# Altium PCB PCB1.PcbDoc
Units mm, origin at the board's own origin, x right, y up, seen from the top; angles counter-clockwise.
Board outline 38.5 x 20.5 mm, 2 copper layers (Top Layer, Bottom Layer); 4 components, 6 nets, 14 pads, 2 vias.
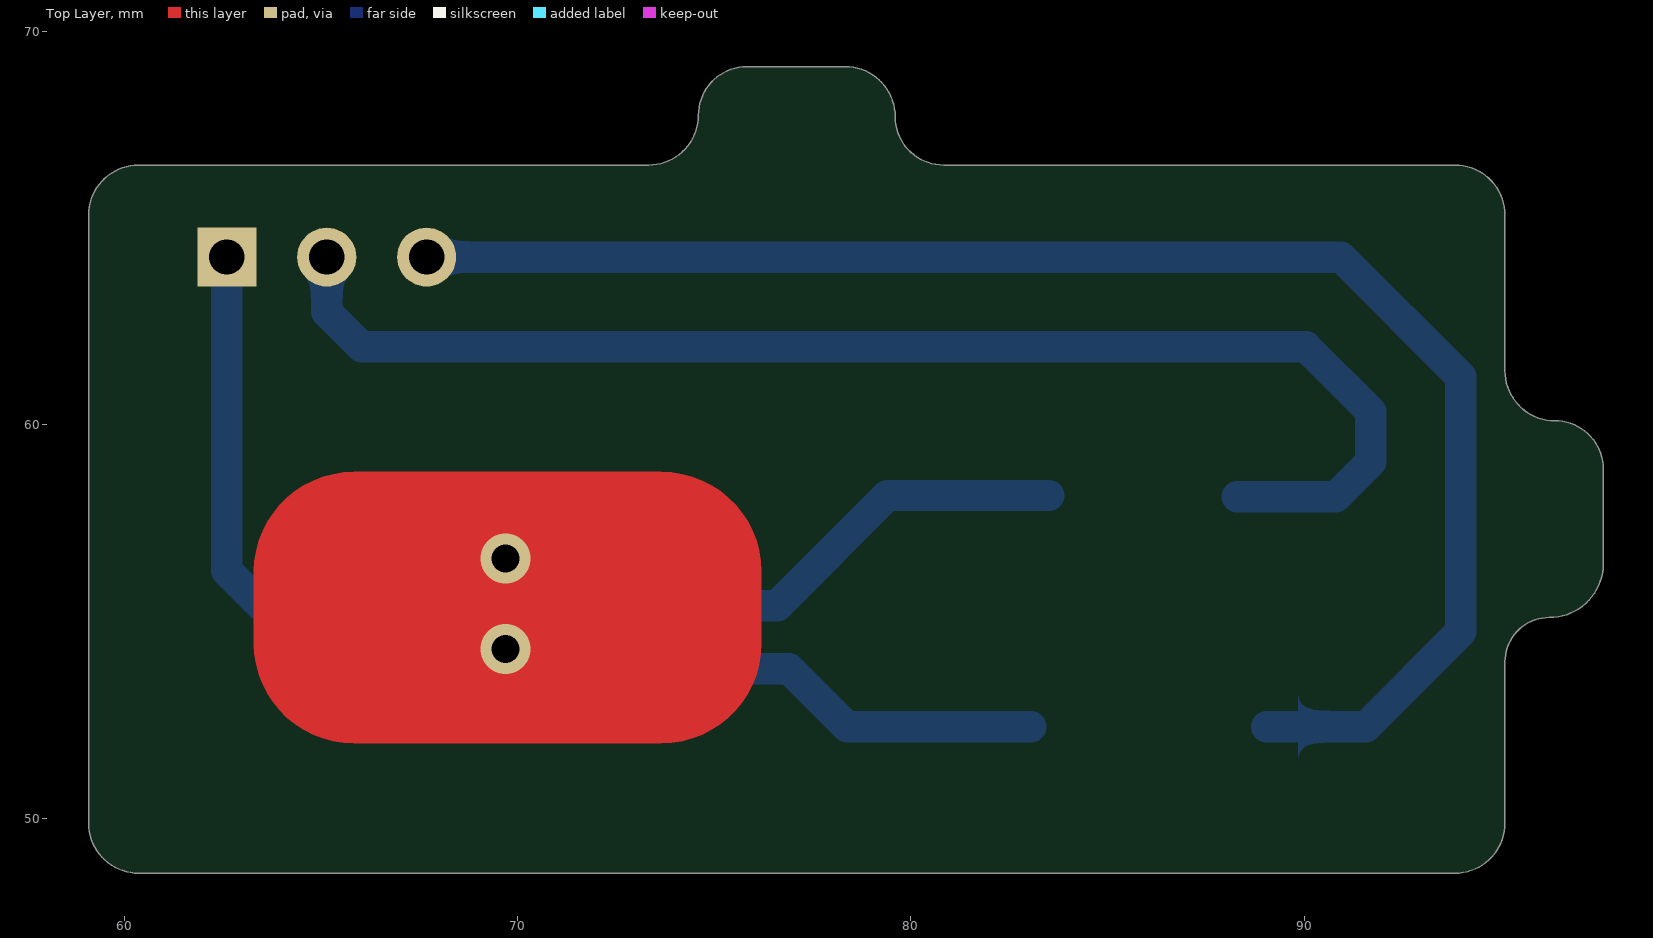
[diagram p0: Top Layer view]
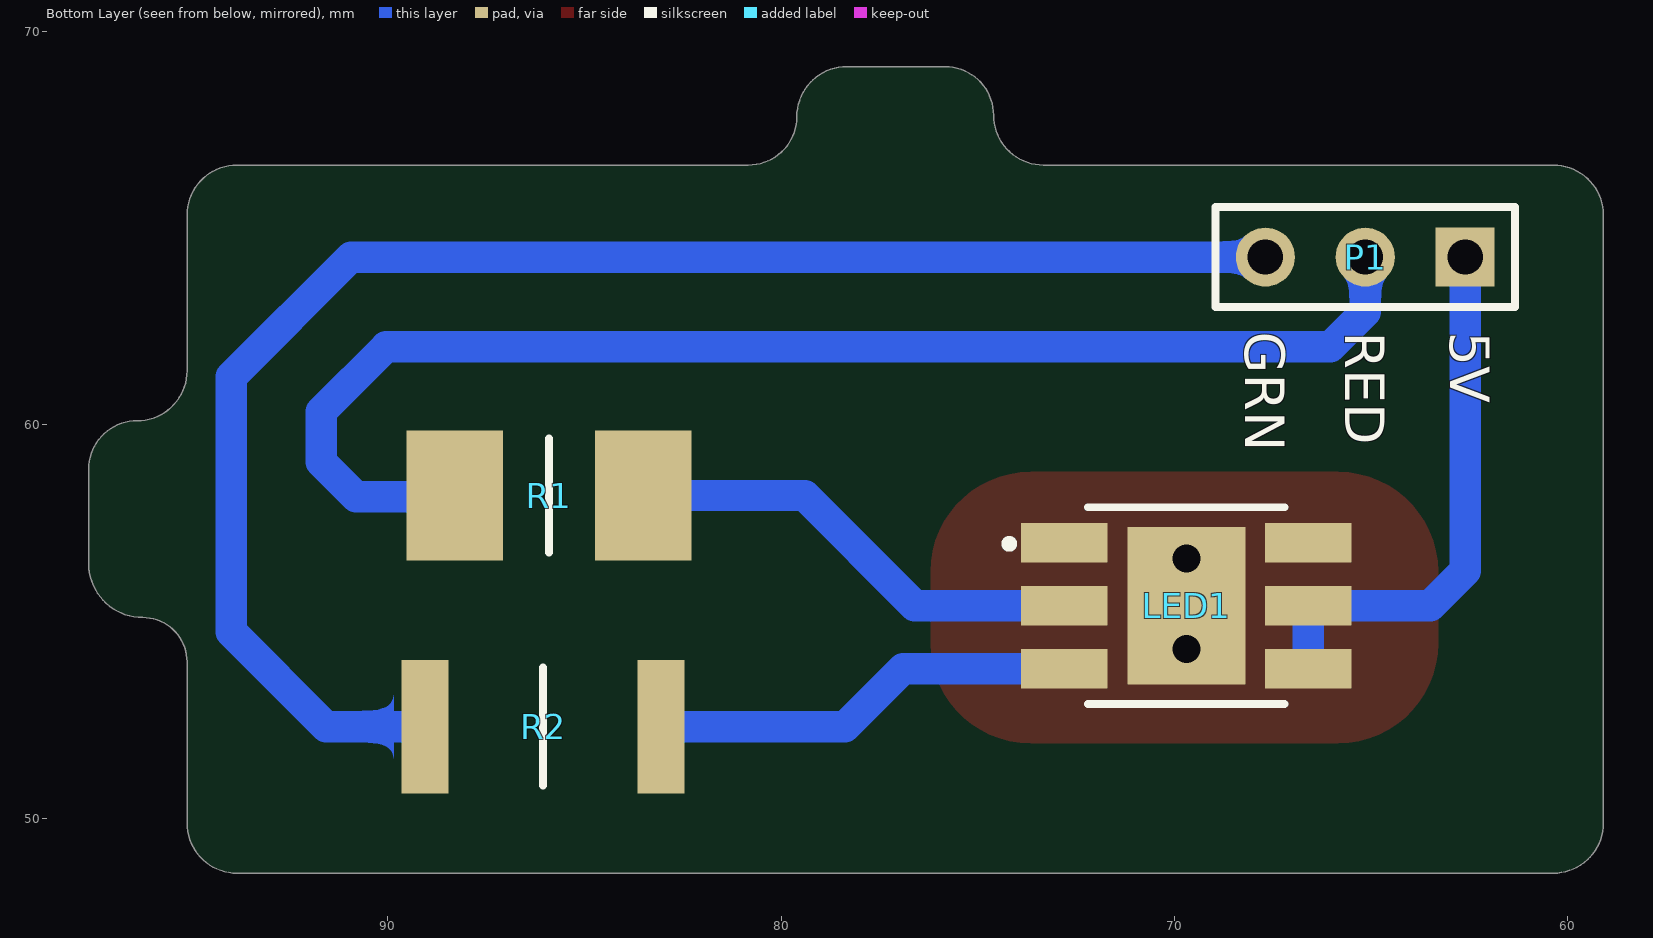
[diagram p1: Bottom Layer view, seen from below]
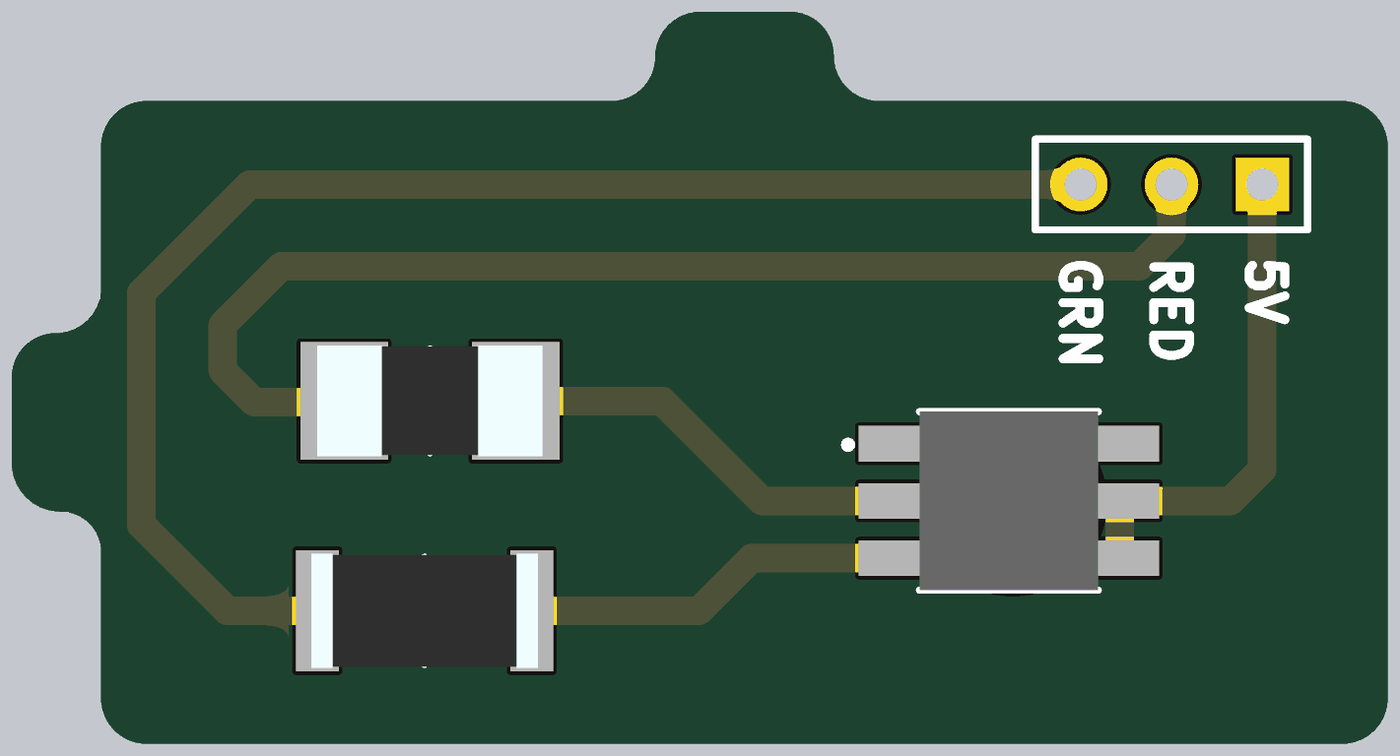
[diagram p2: 3D render of the assembled board from below, using the file's embedded part models]

## Layer stack, top to bottom
Top Solder: solder mask 0.0102, Solder Resist, Dk 3.5
Top Layer: signal copper 0.0356
Dielectric 1: dielectric 0.32, FR-4, Dk 4.8
Bottom Layer: signal copper 0.0356
Bottom Solder: solder mask 0.0102, Solder Resist, Dk 3.5

## Board outline
59.1,49.87 ccw(c60.37,49.87) 60.37,48.6 93.83,48.6 ccw(c93.83,49.87) 95.1,49.87 95.1,53.97 cw(c96.23,53.97) 96.23,55.1 ccw(c96.23,56.47) 97.6,56.47 97.6,58.87 ccw(c96.37,58.87) 96.37,60.1 cw(c96.37,61.37) 95.1,61.37 95.1,65.33 ccw(c93.83,65.33) 93.83,66.6 80.83,66.6 cw(c80.83,67.83) 79.6,67.83 ccw(c78.33,67.83) 78.33,69.1 75.83,69.1 ccw(c75.83,67.87) 74.6,67.87 cw(c73.33,67.87) 73.33,66.6 60.37,66.6 ccw(c60.37,65.33) 59.1,65.33

## Design rules (kind name [scope] priority, off if disabled: settings)
Clearance [All] p1: gap=0.254 ignorepadtopadclearanceinfootprint=FALSE except(0: Arc-Hole Track-Hole SMDPad-Hole THPad-Hole Via-Hole Fill-Hole Poly-Hole Region-Hole Text-Hole)
DiffPairsRouting [All] p1: maxlimit=0.254 minlimit=0.254 mostfreqgap=0.254 substack1={E7AE5A0F-C7F4-4285-B401-B36C422C352A} toplayer_{e7ae5a0f-c7f4-4285-b401-b36c422c352a}_minwidth=0.381 toplayer_{e7ae5a0f-c7f4-4285-b401-b36c422c352a}_maxwidth=0.381 toplayer_{e7ae5a0f-c7f4-4285-b401-b36c422c352a}_prefwidth=0.381 bottomlayer_{e7ae5a0f-c7f4-4285-b401-b36c422c352a}_minwidth=0.381 bottomlayer_{e7ae5a0f-c7f4-4285-b401-b36c422c352a}_maxwidth=0.381 bottomlayer_{e7ae5a0f-c7f4-4285-b401-b36c422c352a}_prefwidth=0.381 toplayer_minwidth=0.381 toplayer_maxwidth=0.381 toplayer_prefwidth=0.381 bottomlayer_minwidth=0.381 bottomlayer_maxwidth=0.381 bottomlayer_prefwidth=0.381 substack2={A5FF98CE-8C31-4D82-9BF1-C9C3C175E210} toplayer_{a5ff98ce-8c31-4d82-9bf1-c9c3c175e210}_minwidth=0.381 toplayer_{a5ff98ce-8c31-4d82-9bf1-c9c3c175e210}_maxwidth=0.381 toplayer_{a5ff98ce-8c31-4d82-9bf1-c9c3c175e210}_prefwidth=0.381 bottomlayer_{a5ff98ce-8c31-4d82-9bf1-c9c3c175e210}_minwidth=0.381 bottomlayer_{a5ff98ce-8c31-4d82-9bf1-c9c3c175e210}_maxwidth=0.381 bottomlayer_{a5ff98ce-8c31-4d82-9bf1-c9c3c175e210}_prefwidth=0.381 maxuncoupledlength=12.7
PolygonConnect [All] p1: connectstyle=Relief reliefconductorwidth=0.254 reliefentries=4 polygonreliefangle="90 Angle" airgapwidth=0.254
RoutingVias [All] p1: holewidth=0.711 width=1.27 viastyle="Through Hole" minholewidth=0.711 minwidth=1.27 maxholewidth=0.711 maxwidth=1.27
SolderMaskExpansion [All] p1: expansion=0.102 istentingtop=FALSE
Width [All] p1: maxlimit=3 minlimit=0.254 preferedwidth=0.254 substack1={E7AE5A0F-C7F4-4285-B401-B36C422C352A} substack2={A5FF98CE-8C31-4D82-9BF1-C9C3C175E210}
29 further rules are at their usual default settings.

## Components (designator, comment, footprint, x,y, rotation, side; value= is the part's Value field where it differs from the comment)
LED1 "AAAF5051-05" AAAF505105 69.7,55.4 r180 bottom
P1 "2.54mm" "TH 2.54mm Header 1x3" 62.611,64.262 r0 bottom
R1 "CRM2512-JW-220ELF (22R)" RESC6331X80N 85.9,58.2 r180 bottom
R2 "352113RFT (13R)" RESC6432X65N 86.05,52.324 r180 bottom

## Footprints (in the part's own frame and the unit in brackets; to place one, negate y for a bottom-side part, rotate by r counter-clockwise, add the part's x,y. Pads: shape width x height; smd on the part's side, far side on the other; paste and mask are expansions set on the pad)
AAAF505105 [mm]
  rect 2.2x1 smd: 1(-3.1,1.6) 2(-3.1,0) 3(-3.1,-1.6) 4(3.1,-1.6) 5(3.1,0) 6(3.1,1.6)
  rect 3x4 smd: 7(0,0)
  silkscreen extent -4.6,-2.5 2.5,2.5, body extent -2.5,-2.5 2.5,2.5, height 1.5
RESC6331X80N [mm]
  rect 2.45x3.3 smd: 1(-2.4,0) 2(2.4,0)
  silkscreen extent 0,-1.45 0,1.45, body extent -3.15,-1.55 3.15,1.55, height 0.8
RESC6432X65N [mm]
  rect 1.2x3.4 smd: 1(-3,0) 2(3,0)
  silkscreen extent 0,-1.5 0,1.5, body extent -3.18,-1.6 3.18,1.6, height 0.65
"TH 2.54mm Header 1x3" [mm]
  rect 1.5x1.5 hole 0.9: 1(0,0)
  round 1.5 hole 0.9: 2(2.54,0) 3(5.08,0)
  silkscreen extent -1.27,-1.27 6.35,1.27

## Part data
LED1: "LED", Manufacturer_Name=Kingbright, Mouser Part Number=604-AAAF5051-05, Arrow Part Number=AAAF5051-05, Arrow Price/Stock=https://www.arrow.com/en/products/aaaf5051-05/kingbright?region=nac, Datasheet Link=http://www.kingbrightusa.com/images/catalog/SPEC/AAAF5051-05.pdf, Height=1.4mm, Manufacturer_Part_Number=AAAF5051-05, Mouser Price/Stock=https://www.mouser.co.uk/ProductDetail/Kingbright/AAAF5051-05?qs=wUXugUrL1qwwviBwwIcUtw%3D%3D
P1: library part "TH 2.54mm Header 1x3", Angle=0, Contact=NA, Flange=No, Part Number="TH 2.54mm Header 1x3", Pitch=2.54mm, Positions=3, Row Spacing=2.54mm
R1: library part CRM2512-JW-220ELF, "Resistor", Manufacturer_Name=Bourns, Mouser Part Number=652-CRM2512-JW220ELF, Arrow Part Number=CRM2512-JW-220ELF, Arrow Price/Stock=https://www.arrow.com/en/products/crm2512-jw-220elf/bourns?region=nac, Datasheet Link=http://www.bourns.com/data/global/pdfs/CRM0805_1206_2010.pdf, Height=0.8mm, Manufacturer_Part_Number=CRM2512-JW-220ELF, Mouser Price/Stock=https://www.mouser.co.uk/ProductDetail/Bourns/CRM2512-JW-220ELF/?qs=9fn1gpisni4fbNEQP%252BkdCw%3D%3D
R2: library part 352113RFT, "Resistor", Manufacturer_Name="TE Connectivity", Mouser Part Number=279-352113RFT, Datasheet Link=https://www.te.com/commerce/DocumentDelivery/DDEController?Action=srchrtrv&DocNm=9-1773463-5&DocType=Data%20Sheet&DocLang=English&PartCntxt=2176070-4&DocFormat=pdf, Height=0.65mm, Manufacturer_Part_Number=352113RFT, Mouser Price/Stock=https://www.mouser.co.uk/ProductDetail/TE-Connectivity-Holsworthy/352113RFT?qs=2kOmHSv6VfT3PsR8sAsIxg%3D%3D

## Via types
v1: diameter 1.27, hole 0.711, Top Layer to Bottom Layer, 2 vias

## Nets (pads, with @x,y where several pads share a name; then routed paths per layer and width w, separated by ;. In a path a pad name is that pad's centre, name@x,y a point inside that pad or via, vN(x,y) a via of type N, cw(c..) or ccw(c..) an arc to the next point about the centre after c; other vN are vias at no path point)
"Anode 5V": LED1.4 LED1.5 P1.1 | length 13.9
  Bottom Layer w0.8: P1.1 62.611,56.289 63.5,55.4 LED1.5 LED1.4
GND: LED1.7
  other v1: 69.7,54.3 69.7,56.6
Green: P1.3 R2.1 | length 40
  Bottom Layer w0.8: P1.3 90.932,64.262 93.98,61.214 93.98,54.737 91.567,52.324 R2.1
NetLED1_2: LED1.2 R1.2 | length 11.9
  Bottom Layer w0.8: LED1.2 76.6,55.4 79.4,58.2 R1.2
NetLED1_3: LED1.3 R2.2 | length 10.9
  Bottom Layer w0.8: LED1.3 76.9,53.8 78.376,52.324 R2.2
Red: P1.2 R1.1 | length 34
  Bottom Layer w0.8: P1.2 65.151,62.865 66.04,61.976 90.043,61.976 91.694,60.325 91.694,59.055 90.805,58.166 R1.1@88.3,58.166
pads on no net: LED1.1 LED1.6

## Polygon pours and split planes (outlines as drawn)
no net on Top Solder "NONET_L-01_P-001" (solid): 63.3,56.26 cw(c65.84,56.26) 65.84,58.8 73.656,58.8 cw(c73.66,56.26) 76.2,56.26 76.2,54.44 cw(c73.66,54.44) 73.66,51.9 65.84,51.9 cw(c65.84,54.44) 63.3,54.44

## Other copper
Top Layer:
  region net GND: 76.2,56.26 ccw(c73.66,56.26) 73.66,58.8 65.84,58.8 ccw(c65.84,56.26) 63.3,56.26 63.3,54.44 ccw(c65.84,54.44) 65.84,51.9 73.66,51.9 ccw(c73.66,54.44) 76.2,54.44

## Silkscreen, mask and mechanical layers (free items; w line width, h text height)
Bottom Overlay:
  text "5V" at 62.992,62.357 h1 r90
  text "RED" at 65.659,62.357 h1 r90
  text "GRN" at 68.199,62.357 h1 r90
Bottom Solder:
  circle w2.5: c69.596,55.372 r1.4
Drill Drawing:
  circle w0.254: c61.456,82.4 r0.847
  lines w0.254: 59.1,49.87 ccw(c60.37,49.87) 60.37,48.6 93.83,48.6 ccw(c93.83,49.87) 95.1,49.87 95.1,53.97 cw(c96.23,53.97) 96.23,55.1 ccw(c96.23,56.47) 97.6,56.47 97.6,58.87 ccw(c96.37,58.87) 96.37,60.1 cw(c96.37,61.37) 95.1,61.37 95.1,65.33 ccw(c93.83,65.33) 93.83,66.6 80.83,66.6 cw(c80.83,67.83) 79.6,67.83 ccw(c78.33,67.83) 78.33,69.1 75.83,69.1 ccw(c75.83,67.87) 74.6,67.87 cw(c73.33,67.87) 73.33,66.6 67.2,66.6 60.37,66.6 ccw(c60.37,65.33) 59.1,65.33 59.1,49.87 ; 60.609,77.743 62.303,77.743 62.303,79.437 60.609,79.437 60.609,77.743
  lines w0.381: 59.09,76.6 323.787,76.6 ; 59.09,84.22 323.787,84.22 ; 73.083,72.79 73.083,88.03 ; 85.272,72.79 85.272,88.03 ; 113.204,72.79 113.204,88.03 ; 126.053,72.79 126.053,88.03 ; 144.691,72.79 144.691,88.03 ; 182.78,72.79 182.78,88.03 ; 197.762,72.79 197.762,88.03 ; 216.705,72.79 216.705,88.03 ; 233.211,72.79 233.211,88.03 ; 254.897,72.79 254.897,88.03 ; 288.77,72.79 288.77,88.03 ; 59.09,72.79 323.787,72.79 323.787,88.03 59.09,88.03 59.09,72.79
  text "Symbol" at 61.376,85.363 h1.83
  text "Count" at 74.226,85.363 h1.83
  text "Hole Size" at 86.415,85.363 h1.83
  text "Plated" at 114.347,85.363 h1.83
  text "Hole Type" at 127.196,85.363 h1.83
  text "Drill Layer Pair" at 145.834,85.363 h1.83
  text "Via/Pad" at 183.923,85.363 h1.83
  text "Pad Shape" at 198.905,85.363 h1.83
  text "Template" at 217.848,85.363 h1.83
  text "Description" at 234.354,85.363 h1.83
  text "Hole Tolerance (+)" at 256.04,85.363 h1.83
  text "Hole Tolerance (-)" at 289.913,85.363 h1.83
  text "2" at 74.226,81.553 h1.52
  text "0.711mm (28.00mil)" at 86.415,81.553 h1.52
  text "PTH" at 114.347,81.553 h1.52
  text "Round" at 127.196,81.553 h1.52
  text "Top Layer - Bottom Layer" at 145.834,81.553 h1.52
  text "Via" at 183.923,81.553 h1.52
  text "Rounded" at 198.905,81.553 h1.52
  text "v127h71" at 217.848,81.553 h1.52
  text "3" at 74.226,77.743 h1.52
  text "0.900mm (35.43mil)" at 86.415,77.743 h1.52
  text "PTH" at 114.347,77.743 h1.52
  text "Round" at 127.196,77.743 h1.52
  text "Top Layer - Bottom Layer" at 145.834,77.743 h1.52
  text "Pad" at 183.923,77.743 h1.52
  text "(Mixed)" at 198.905,77.743 h1.52
  text "(Mixed)" at 217.848,77.743 h1.52
  text "5 Total" at 74.226,73.933 h1.52